# Altium PCB SparkFun Load Sensor Combinator v11.PcbDoc
Units mil, origin at the board's own origin, x right, y up, seen from the top; angles counter-clockwise.
Board outline 1100 x 1200 mil, 2 copper layers (Top, Bottom), stack 61.811 mil thick; 14 components, 37 nets, 34 pads, 3 vias.
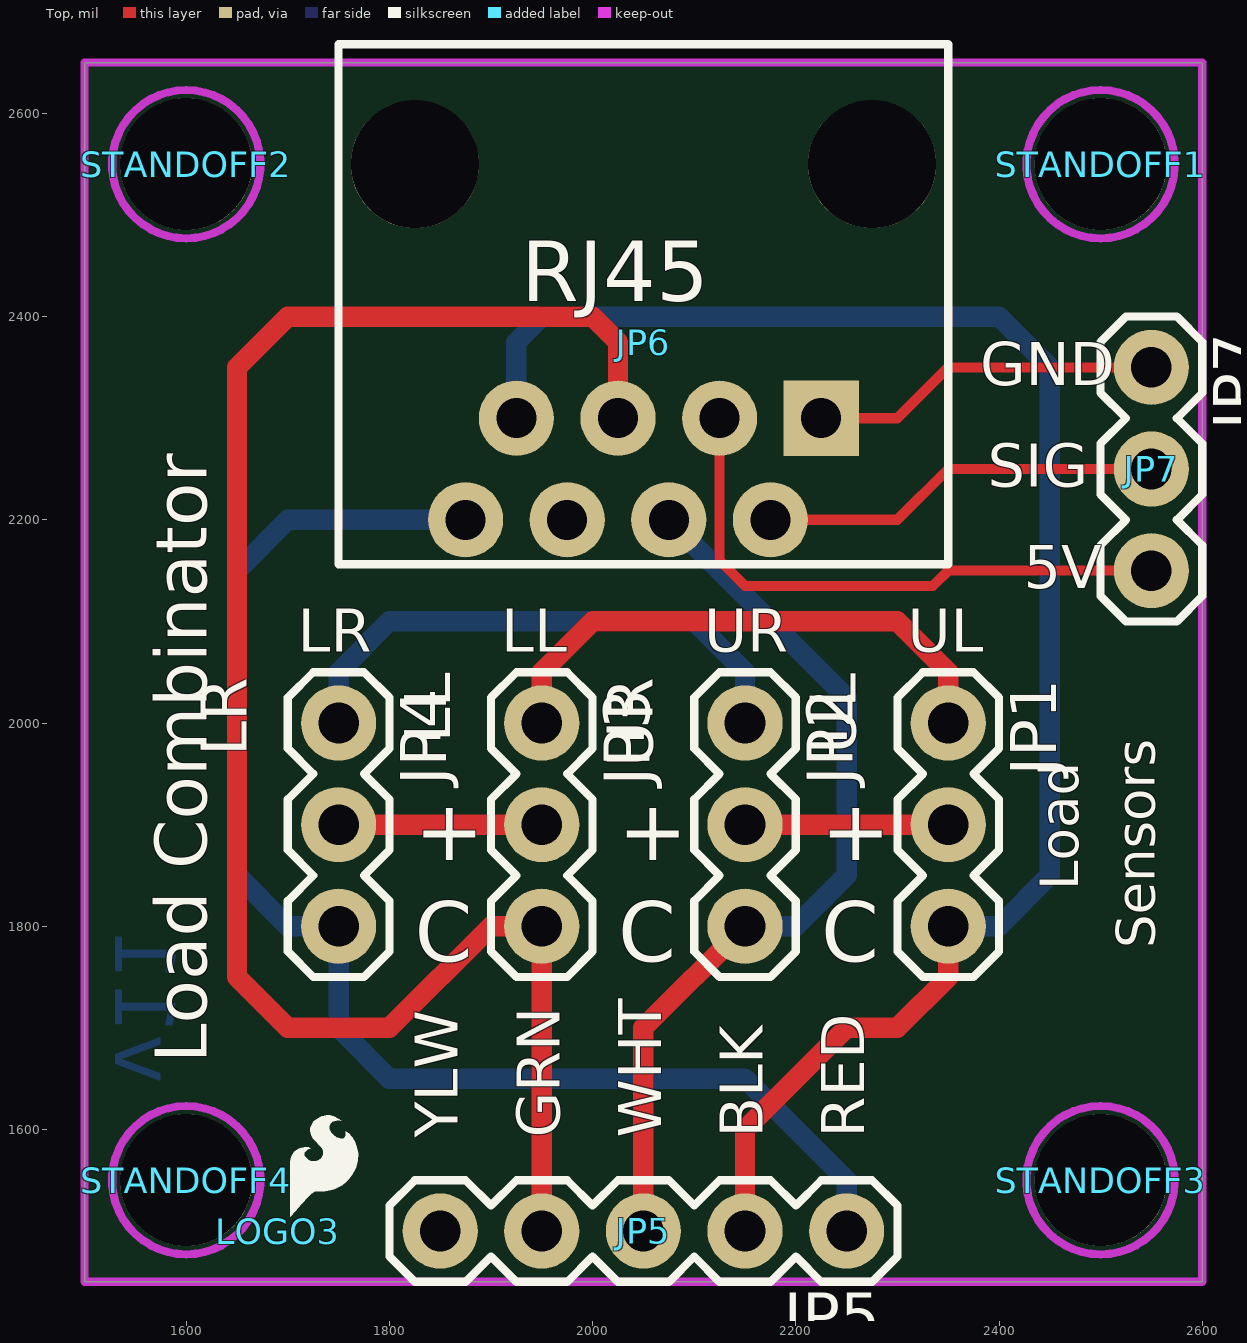
[diagram p0: Top view]
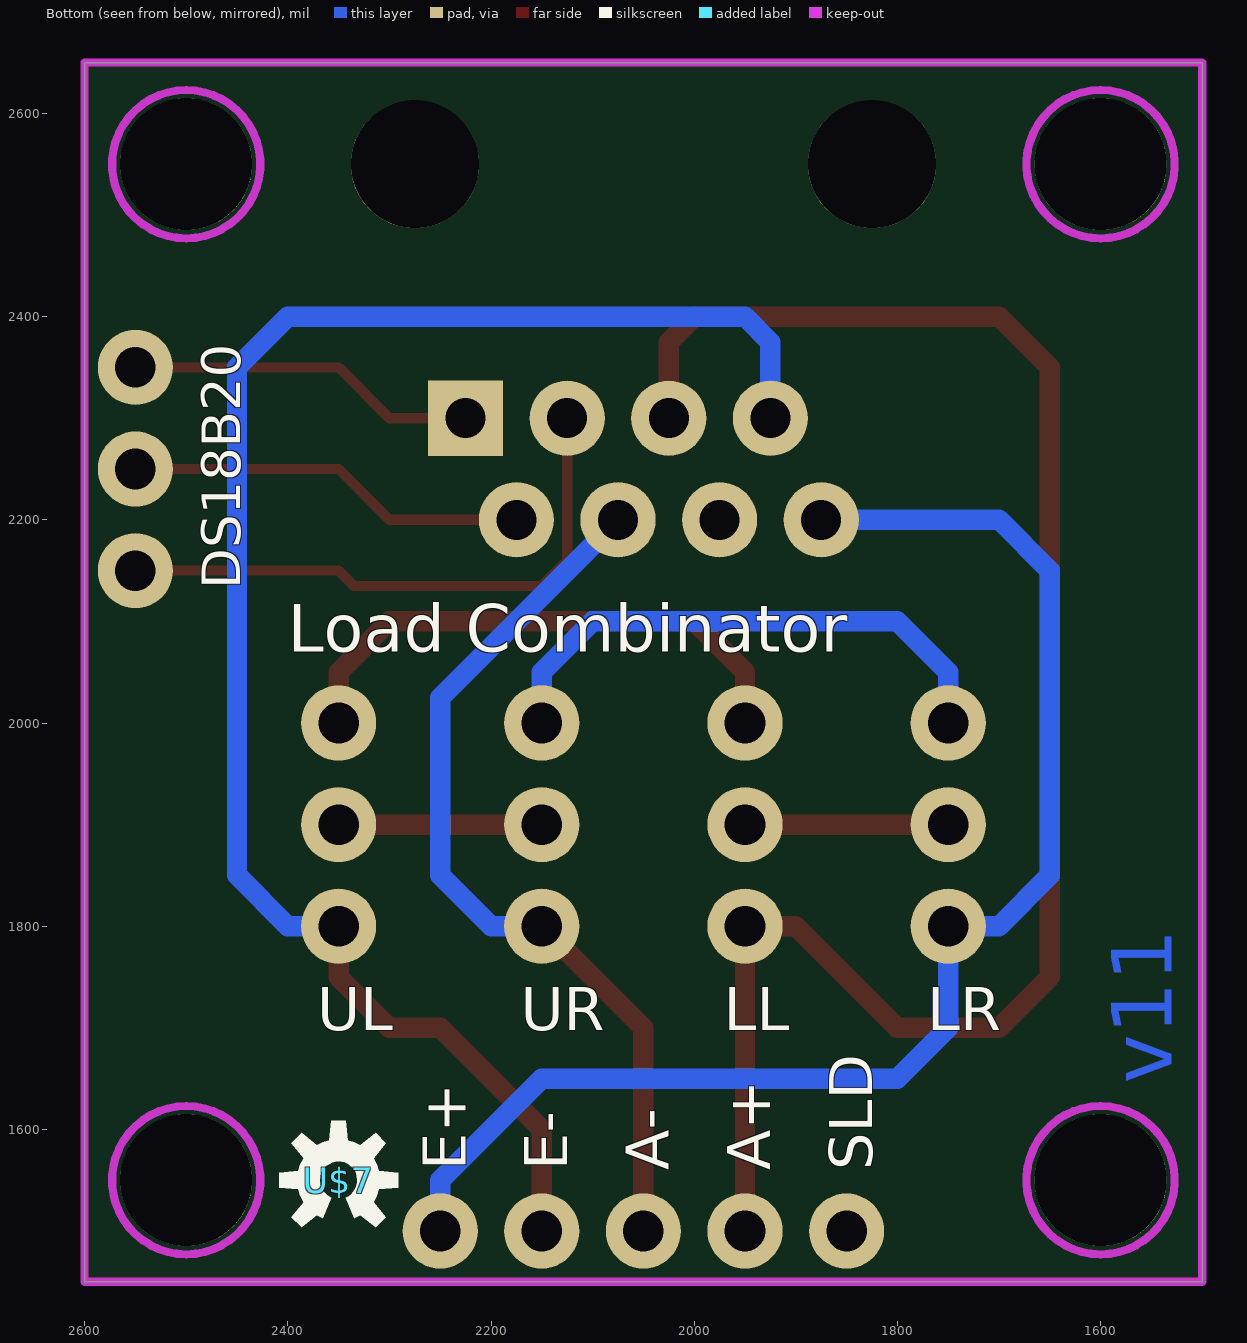
[diagram p1: Bottom view, seen from below]

## Layer stack, top to bottom
Top Solder: solder mask 0.4, Solder Resist, Dk 3.5
Top: signal copper 1.378
Dielectric 1: core 59.0551, FR-4, Dk 4.8
Bottom: signal copper 1.378
Bottom Solder: solder mask 0.4, Solder Resist, Dk 3.5

## Board outline
2600,1450 1500,1450 1500,2650 2600,2650

## Design rules (kind name [scope] priority, off if disabled: settings)
Clearance [All] p1: gap=8 except(0: SMDPad-SMDPad SMDPad-THPad SMDPad-Via)
Clearance "Clearance (Same Net)" [All] p2: gap=0 except(8: SMDPad-SMDPad SMDPad-THPad SMDPad-Via)
HoleSize HoleSize_1 [All] p1: absolutevalues=TRUE maxlimit=100000 minlimit=20 maxpercent=80.000 minpercent=20.000
HoleSize [All] p2: absolutevalues=TRUE maxlimit=100 minlimit=1 maxpercent=80.000 minpercent=20.000
HoleToHoleClearance mdViaViaSameLayer [All] p1: gap=8 allowstackedmicrovias=TRUE
HoleToHoleClearance [All] p2: gap=10 allowstackedmicrovias=TRUE
PasteMaskExpansion mlMinCreamFrame [All] p1: expansion=0
PasteMaskExpansion [All] p2: expansion=0
PolygonConnect ThermalVias [IsVia] p1: connectstyle=Direct reliefconductorwidth=10 reliefentries=4 polygonreliefangle="90 Angle" airgapwidth=10
PolygonConnect [All] p2: connectstyle=Relief reliefconductorwidth=10 reliefentries=4 polygonreliefangle="90 Angle" airgapwidth=10
RoutingVias [All] p1: holewidth=28 width=50 viastyle="Through Hole" minholewidth=28 minwidth=50 maxholewidth=28 maxwidth=50
SilkToSilkClearance [All] p1 off: silktosilkclearance=10
SilkToSolderMaskClearance [IsPad] p1 off: minsilkscreentomaskgap=10 clearancetoexposedcopper=TRUE
SolderMaskExpansion mlMinStopFrame [All] p1: expansion=4
SolderMaskExpansion [All] p2: expansion=4
Width Width_1 [All] p1: maxlimit=100000 minlimit=8 preferedwidth=10
Width [All] p2: maxlimit=10 minlimit=10 preferedwidth=10
25 further rules are at their usual default settings.

## Components (designator, comment, footprint, x,y, rotation, side; value= is the part's Value field where it differs from the comment)
FRAME1 "" CREATIVE_COMMONS 1000,1000 r0 top
JP1 "UL" 1X03 2350,2000 r270 top
JP2 "UR" 1X03 2150,2000 r270 top
JP3 "LL" 1X03 1950,2000 r270 top
JP4 "LR" 1X03 1750,2000 r270 top
JP5 "" 1X05 2250,1500 r180 top
JP6 "" RJ45-8 2050,2550 r180 top
JP7 "" 1X03 2550,2350 r270 top
LOGO3 "" SFE_LOGO_FLAME_.1 1690,1500 r0 top
STANDOFF1 "" STAND-OFF 2500,2550 r180 top
STANDOFF2 "" STAND-OFF 1600,2550 r180 top
STANDOFF3 "" STAND-OFF 2500,1550 r180 top
STANDOFF4 "" STAND-OFF 1600,1550 r180 top
U$7 "" OSHW-LOGO-S 2350,1550 r180 bottom

## Footprints (in the part's own frame and the unit in brackets; to place one, negate y for a bottom-side part, rotate by r counter-clockwise, add the part's x,y. Pads: shape width x height; smd on the part's side, far side on the other; paste and mask are expansions set on the pad)
1X03 [mil] "1X03"
  round 74 hole 40: 1(0,0) 2(100,0) 3(200,0)
  silkscreen extent -50,-50 250,50
1X05 [mil] "1X05"
  round 74 hole 40: 1(0,0) 2(100,0) 3(200,0) 4(300,0) 5(400,0)
  silkscreen extent -50,-50 450,50
CREATIVE_COMMONS [mil] "CREATIVE_COMMONS"
OSHW-LOGO-S [mil] "OSHW-LOGO-S"
  silkscreen extent -59,-47 59,59
RJ45-8 [mil] "RJ45-8"
  round 125.98 hole 125.98: 1(-225,0) 1(225,0)
  rect 74x74 hole 39.37: 1(-175,250)
  round 74 hole 39.37: 2(-125,350) 3(-75,250) 4(-25,350) 5(25,250) 6(75,350) 7(125,250) 8(175,350)
  silkscreen extent -300,-118 300,394
SFE_LOGO_FLAME_.1 [mil] "SFE_LOGO_FLAME_.1"
  silkscreen extent 13,14 79,114
STAND-OFF [mil] "STAND-OFF"
  round 130 hole 130: 1(0,0)
  Top keep-out lines w8: 0,73 cw(c0,0) 0,-73 cw(c0,0) 0,73
  Bottom keep-out lines w8: 0,73 cw(c0,0) 0,-73 cw(c0,0) 0,73

## Part data
FRAME1: library part CREATIVE_COMMONS
JP1 JP2 JP3 JP4 JP7: library part 1X03
JP5: library part 1X05
JP6: library part RJ45-8
LOGO3: library part SFE_LOGO_FLAME_.1
STANDOFF1 STANDOFF2 STANDOFF3 STANDOFF4: library part STAND-OFF
U$7: library part OSHW-LOGO-S

## Via types
v1: diameter 196.85, hole 125.98, Top to Bottom, 3 vias

## Nets (pads, with @x,y where several pads share a name; then routed paths per layer and width w, separated by ;. In a path a pad name is that pad's centre, name@x,y a point inside that pad or via, vN(x,y) a via of type N, cw(c..) or ccw(c..) an arc to the next point about the centre after c; other vN are vias at no path point)
5V: JP6.3 JP7.3 | length 581.6
  Top w10: JP6.3 2125,2160 2150,2135 2335,2135 2350,2150 JP7.3
A+: JP3.3 JP5.4 JP6.5 | length 1743.2
  Top w20: JP5.4 JP3.3 1900,1800 1800,1700 1700,1700 1650,1750 1650,2350 1700,2400 2000,2400 2025,2375 JP6.5
A-: JP2.3 JP5.3 JP6.4 | length 884.6
  Top w20: JP5.3 2050,1700 JP2.3
  Bottom w20: JP6.4 2250,2025 2250,1850 2200,1800 JP2.3
E+: JP4.3 JP5.1 JP6.8 | length 1378.6
  Bottom w20: JP6.8 1700,2200 1650,2150 1650,1850 1700,1800 JP4.3 1750,1700 1800,1650 2150,1650 2250,1550 JP5.1
E-: JP1.3 JP5.2 JP6.7 | length 1663.9
  Top w20: JP5.2 2150,1600 2250,1700 2300,1700 2350,1750 JP1.3
  Bottom w20: JP6.7 1925,2375 1950,2400 2400,2400 2450,2350 2450,1850 2400,1800 JP1.3
GND: JP6.1@2225,2300 JP7.1 | length 345.7
  Top w10: JP6.1@2225,2300 2300,2300 2350,2350 JP7.1
N$1: JP2.1 JP4.1 | length 541.4
  Bottom w20: JP4.1 1750,2050 1800,2100 2100,2100 2150,2050 JP2.1
N$2: JP1.1 JP3.1 | length 541.4
  Top w20: JP3.1 1950,2050 2000,2100 2300,2100 2350,2050 JP1.1
N$3: JP3.2 JP4.2 | length 200
  Top w20: JP4.2 JP3.2
N$4: JP1.2 JP2.2 | length 200
  Top w20: JP2.2 JP1.2
N$15: 
N$17: 
N$22: 
N$24: 
N$29: 
N$31: 
N$36: 
N$40: 
N$45: 
N$48: 
N$49: 
N$55: 
N$56: 
N$61: 
N$64: 
N$69: 
N$70: 
N$75: 
N$78: 
N$83: 
N$84: 
N$89: 
N$92: 
N$97: 
N$99: 
N$100: 
TEMP_DAT: JP6.2 JP7.2 | length 395.7
  Top w10: JP6.2 2300,2200 2350,2250 JP7.2
pads on no net: JP5.5 JP6.1@1825,2550 JP6.1@2275,2550 JP6.6 STANDOFF1.1 STANDOFF2.1 STANDOFF3.1 STANDOFF4.1
copper on no net:
  other v1: 950,-2262.32 -725,-1002.32 -555,-867.32

## Keep-outs
Keep-Out Layer:
  the board outline again, w8

## Other copper
Bottom:
  text "v11" at 1530,1645 h59.5 r270

## Silkscreen, mask and mechanical layers (free items; w line width, h text height)
Top Overlay:
  text "RJ45" at 1930,2415 h59.5
  text "GND" at 2381.7,2332.51 h42.5
  text "SIG" at 2388.78,2232.51 h42.5
  text "5V" at 2424.19,2132.51 h42.5
  text "LR" at 1710,2070 h42.5
  text "LL" at 1910,2070 h42.5
  text "UR" at 2110,2070 h42.5
  text "UL" at 2310,2070 h42.5
  text "-" at 1825,1965 h59.5
  text "-" at 2025,1965 h59.5
  text "-" at 2225,1965 h59.5
  text "+" at 1825,1865 h59.5
  text "+" at 2025,1865 h59.5
  text "+" at 2225,1865 h59.5
  text "Load" at 2478.24,1835.64 h38.25 r90
  text "Sensors" at 2553.24,1778.28 h38.25 r90
  text "C" at 1825,1765 h59.5
  text "C" at 2025,1765 h59.5
  text "C" at 2225,1765 h59.5
  text "Load Combinator" at 1620,1665 h51 r90
  text "YLW" at 1867.49,1591.7 h42.5 r90
  text "GRN" at 1967.49,1591.7 h42.5 r90
  text "WHT" at 2067.49,1591.7 h42.5 r90
  text "BLK" at 2167.49,1591.7 h42.5 r90
  text "RED" at 2267.49,1591.7 h42.5 r90
Bottom Overlay:
  text "DS18B20" at 2446.76,2131.47 h38.25 r270
  text "Load Combinator" at 2400,2070 h46.75
  text "LR" at 1770.81,1697.51 h42.5
  text "LL" at 1970.81,1697.51 h42.5
  text "UR" at 2170.81,1697.51 h42.5
  text "UL" at 2370.81,1697.51 h42.5
  text "SLD" at 1825,1560 h42.5 r270
  text "A+" at 1925,1560 h42.5 r270
  text "A-" at 2025,1560 h42.5 r270
  text "E-" at 2125,1560 h42.5 r270
  text "E+" at 2225,1560 h42.5 r270
Dimension:
  the board outline again, w8
Measures:
  text "Units are in inches" at 1500,3400 h59.5
tDocu:
  text "N. Seidle" at 2200,1000 h59.5
  text "Revised by:" at 1500,800 h59.5
  text "A. Wende" at 2200,800 h59.5

## Dimensions
1500,1450 to 1500,2650 on Measures
1600,2550 to 1600,1550 on Measures
1500,2650 to 2600,2650 on Measures
1600,2550 to 2500,2550 on Measures
1500,1450 to 1500,2975 on Measures
1500,1450 to 1850,1450 on Measures
2600,1450 to 2600,1800 on Measures

## Text inside footprints (layer, text, board x,y; h text height)
FRAME1: tDocu "Released under the Creative Commons Attribution Share-Alike 4.0 License" at 200,1200 h59.5; tDocu "https://creativecommons.org/licenses/by-sa/4.0/" at 1000,1100 h59.5; tDocu "Designed by:" at 1450,1000 h59.5